# Altium PCB ADS1294.PcbDoc
Units mm, origin at the board's own origin, x right, y up, seen from the top; angles counter-clockwise.
Board outline 50 x 30 mm, 2 copper layers (Top Layer, Bottom Layer); 83 components, 75 nets, 454 pads, 27 vias.
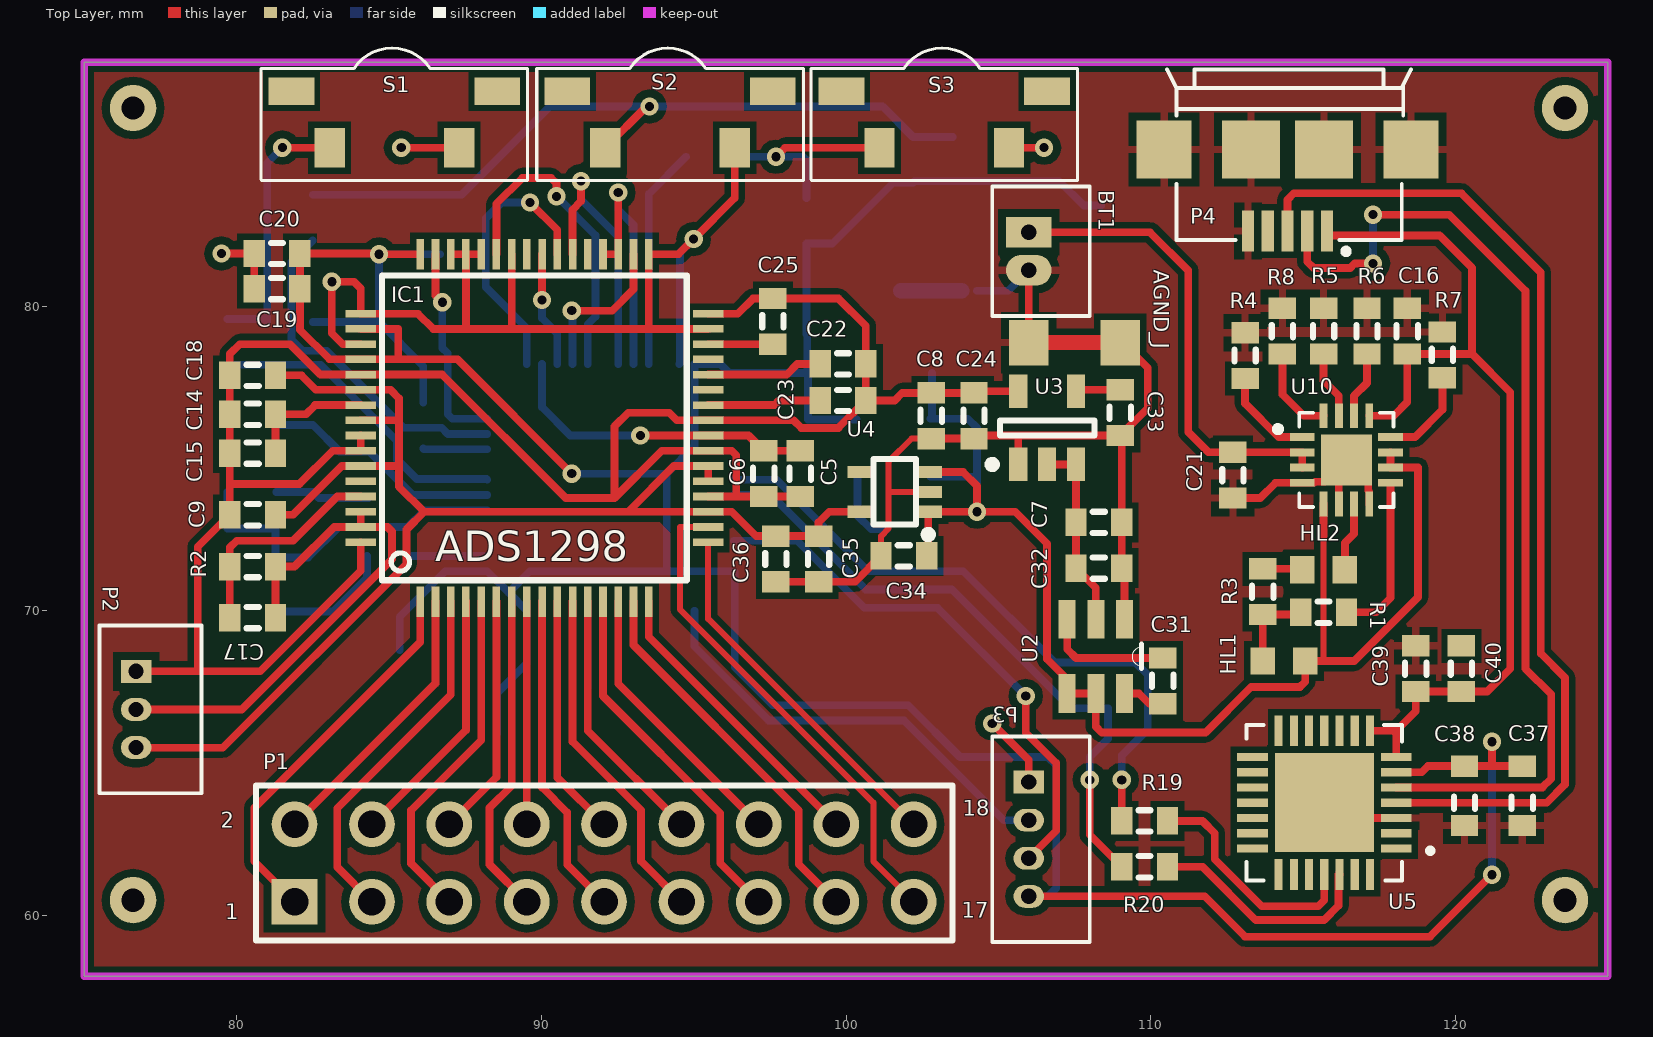
[diagram p0: Top Layer view]
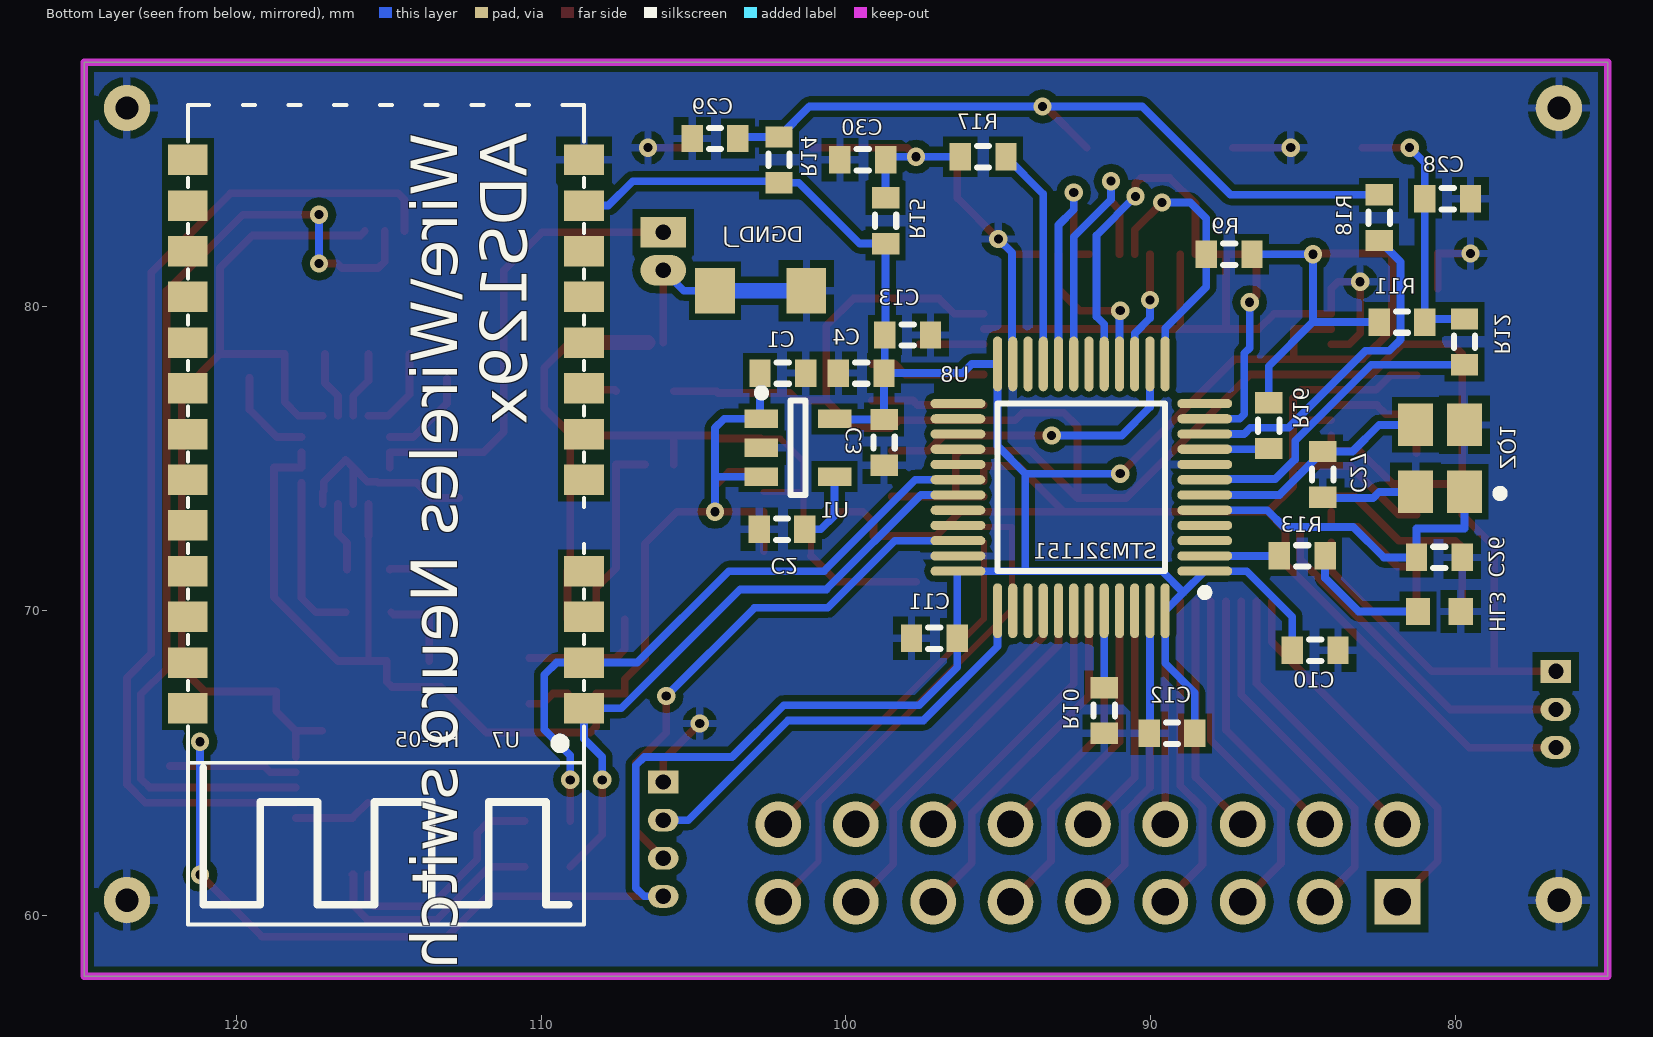
[diagram p1: Bottom Layer view, seen from below]

## Layer stack, top to bottom
Top Solder: solder mask 0.0102, Solder Resist, Dk 3.5
Top Layer: signal copper 0.0356
Dielectric 1: dielectric 0.32, FR-4, Dk 4.8
Bottom Layer: signal copper 0.0356
Bottom Solder: solder mask 0.0102, Solder Resist, Dk 3.5

## Board outline
75,58 125,58 125,88 75,88

## Design rules (kind name [scope] priority, off if disabled: settings)
Clearance [All] p1: gap=0.254 except(0.15: Track-THPad SMDPad-SMDPad; 0.2: Track-Track Track-SMDPad Track-Poly SMDPad-Poly)
PolygonConnect [All] p1: connectstyle=Relief reliefconductorwidth=0.254 reliefentries=4 polygonreliefangle="90 Angle" airgapwidth=0.254
RoutingVias [All] p1: holewidth=0.711 width=1.27 viastyle="Through Hole" minholewidth=0.711 minwidth=1.27 maxholewidth=0.711 maxwidth=1.27
SolderMaskExpansion [All] p1: expansion=0.102
Width [All] p1: maxlimit=0.8 minlimit=0.2 preferedwidth=0.254 toplayer_maxwidth=0.254 bottomlayer_minwidth=0.254 minimp=50.000000 maximp=50.000000 favimp=50.000000
30 further rules are at their usual default settings.

## Components (designator, comment, footprint, x,y, rotation, side; value= is the part's Value field where it differs from the comment)
AGND_J "Jumper 0805" "2012[0805] - Jumper - wa" 107.5,78.8 r180 top net-tie
BT1 "Battery" 653002114822 106,81.8 r270 top
C1 "Cap Semi" J1-0603#1 102.075,77.8 r0 bottom
C2 "Cap Semi" J1-0603#1 102.1,72.675 r180 bottom
C3 "Cap Semi" J1-0603#1 98.75,75.525 r90 bottom
C4 "Cap Semi" J1-0603#1 99.5,77.8 r180 bottom
C5 "Cap Semi" J1-0603#1 98.5,74.5 r270 top
C6 "Cap Semi" J1-0603#1 97.3,74.5 r270 top
C7 "Cap Semi" J1-0603#1 108.3,72.9 r0 top
C8 "Cap Semi" J1-0603#1 102.8,76.4 r90 top
C9 "Cap Semi" J1-0603#1 80.525,73.15 r0 top
C10 "Cap Semi" J1-0603#1 84.6,68.7 r0 bottom
C11 "Cap Semi" J1-0603#1 97.1,69.1 r180 bottom
C12 "Cap Semi" J1-0603#1 89.3,65.975 r180 bottom
C13 "Cap Semi" J1-0603#1 97.975,79.05 r0 bottom
C14 "Cap Semi" J1-0603#1 80.525,76.45 r0 top
C15 "Cap Semi" J1-0603#1 80.525,75.175 r0 top
C16 "Cap Semi" J1-0603#1 118.425,79.175 r270 top
C17 "Cap Semi" J1-0603#1 80.525,69.775 r0 top
C18 "Cap Semi" J1-0603#1 80.525,77.725 r0 top
C19 "Cap Semi" J1-0603#1 81.325,80.575 r180 top
C20 "Cap Semi" J1-0603#1 81.325,81.725 r180 top
C21 "Cap Semi" J1-0603#1 112.7,74.45 r270 top
C22 "Cap Semi" J1-0603#1 99.9,78.1 r180 top
C23 "Cap Semi" J1-0603#1 99.9,76.9 r180 top
C24 "Cap Semi" J1-0603#1 104.2,76.4 r90 top
C25 "Cap Semi" J1-0603#1 97.6,79.5 r270 top
C26 "Cap Semi" J1-0603#1 80.525,71.75 r180 bottom
C27 "Cap Semi" J1-0603#1 84.35,74.475 r270 bottom
C28 "Cap Semi" J1-0603#1 80.25,83.525 r180 bottom
C29 "Cap Semi" J1-0603#1 104.3,85.5 r0 bottom
C30 "Cap Semi" J1-0603#1 99.45,84.8 r0 bottom
C31 "Cap Semi" J1-0603#1 110.4,67.7 r90 top
C32 "Cap Semi" J1-0603#1 108.3,71.4 r0 top
C33 "Cap Semi" J1-0603#1 109,76.5 r90 top
C34 "Cap Semi" J1-0603#1 101.9,71.8 r0 top
C35 "Cap Semi" J1-0603#1 99.1,71.7 r90 top
C36 "Cap Semi" J1-0603#1 97.7,71.7 r90 top
C37 "Cap Semi" J1-0603#2 122.2,63.7 r270 top
C38 "Cap Semi" J1-0603#2 120.3,63.7 r270 top
C39 "Cap Semi" J1-0603#1 118.7,68.1 r90 top
C40 "Cap Semi" J1-0603#1 120.2,68.1 r90 top
DGND_J "Jumper 0805" "2012[0805] - Jumper - wa" 102.8,80.5 r0 bottom net-tie
HL1 "LED_RED" 1608[0603] 114.375,68.35 r180 top
HL2 "LED_GREEN" 1608[0603] 115.675,71.35 r0 top
HL3 "LED_BLUE" 1608[0603] 80.525,69.975 r180 bottom
IC1 "ADS1298" HTQFP-64-PAP 89.775,76 r90 top
P1 "Header 9X2" HDR2X9 81.9,60.45 r0 top
P2 "Header" 653003114822 76.7,66.76 r270 top
P3 "WE-1.25 mm Pitch 653004114822" 653004114822 106,62.5 r270 top
P4 "Micro_USB" Micro_USB 115,85 r270 top
R1 "Res1" J1-0603#1 115.675,69.95 r0 top
R2 "Res1" J1-0603#1 80.525,71.45 r180 top
R3 "Res1" J1-0603#1 113.675,70.625 r90 top
R4 "Res1" J1-0603#1 113.1,78.375 r270 top
R5 "Res1" J1-0603#1 115.675,79.175 r270 top
R6 "Res1" J1-0603#1 117.1,79.175 r270 top
R7 "Res1" J1-0603#1 119.575,78.4 r270 top
R8 "Res1" J1-0603#1 114.325,79.175 r270 top
R9 "Res1" J1-0603#1 87.425,81.7 r0 bottom
R10 "Res1" J1-0603#1 91.525,66.725 r270 bottom
R11 "Res1" J1-0603#1 81.75,79.475 r0 bottom
R12 "Res1" J1-0603#1 79.7,78.825 r90 bottom
R13 "Res1" J1-0603#1 85.025,71.8 r0 bottom
R14 "Res1" J1-0603#1 102.2,84.8 r270 bottom
R15 "Res1" J1-0603#1 98.7,82.8 r270 bottom
R16 "Res1" J1-0603#1 86.125,76.075 r270 bottom
R17 "Res1" J1-0603#1 95.5,84.9 r0 bottom
R18 "Res1" J1-0603#1 82.5,82.9 r90 bottom
R19 "Res1" J1-0603#1 109.8,63.1 r180 top
R20 "Res1" J1-0603#1 109.8,61.6 r180 top
S1 "SW-PB" KLS7-TS3606B 88.55,87.05 r180 top
S2 "SW-PB" KLS7-TS3606B 97.6,87.05 r180 top
S3 "SW-PB" KLS7-TS3606B 106.6,87.05 r180 top
U1 "TPS79333" TI-DBV5_N 101.575,75.35 r180 bottom
U2 "LM2664M6" *SOT95P300X120-6N 108.2,68.5 r270 top
U3 "TPS72325DBVR" TI-DBV5_N 106.6,76 r90 top
U4 "TLV70012DCKR" TI-DCK5_V 101.6,73.9 r180 top
U5 "CP2102N-A01-GQFN28" QFN50P500X500X80-29N 115.7,63.7 r180 top
U7 "HC-05" BT34P-SMD-1.5-26.9X13.0X2.2MM 115.1,86.6 r0 bottom
U8 "STM32L151" STM-LQFP48_N 92.275,74.05 r0 bottom
U10 "BQ24232HARGTR" QFN50P300X300X100-17N 116.425,74.95 r0 top
ZQ1 "24MHz" CFPX-5 80.5,75 r90 bottom

## Footprints (in the part's own frame and the unit in brackets; to place one, negate y for a bottom-side part, rotate by r counter-clockwise, add the part's x,y. Pads: shape width x height; smd on the part's side, far side on the other; paste and mask are expansions set on the pad)
1608[0603] [mm] "Chip Capacitor, Body 1.6x0.8mm, IPC High Density"
  rect 0.8x0.9 smd: 1(-0.7,0) 2(0.7,0)
  body extent -0.87,-0.48 0.87,0.48, height 1.3
"2012[0805] - Jumper - wa" [mm] "Chip Resistor; Body 2.0 x 1.3 mm (LxW typ)"
  rect 1.3x1.5 smd: 1(-1.5,0) 2(1.5,0)
  Top Layer lines w0.5: 1,0 -1,0
653002114822 [mm] "Male Shrouded Header - 02p 1 row"
  rect 1x1.5 hole 0.5: 1(-0.625,0)
  oval 1x1.5 hole 0.5: 2(0.625,0)
  silkscreen extent -2.12,-1.2 2.12,2, body extent -2.12,-1.2 2.12,2, height 4.21
653003114822 [mm] "Male Shrouded Header - 03p 1 row"
  rect 0.75x1 hole 0.5: 1(-1.25,0)
  oval 0.75x1 hole 0.5: 2(0,0) 3(1.25,0)
  silkscreen extent -2.75,-1.2 2.75,2.15, body extent -2.75,-1.2 2.75,2, height 4.21
653004114822 [mm] "Male Shrouded Header - 04p 1 row"
  rect 0.75x1 hole 0.5: 1(-1.875,0)
  oval 0.75x1 hole 0.5: 2(-0.625,0) 3(0.625,0) 4(1.875,0)
  silkscreen extent -3.37,-1.2 3.37,2, body extent -3.37,-1.2 3.38,2, height 4.21
*SOT95P300X120-6N [mil]
  rect 50x22 smd: 1(-48,37) 2(-48,0) 3(-48,-37) 4(48,-37) 5(48,0) 6(48,37)
  silkscreen extent -16,47 16,59
BT34P-SMD-1.5-26.9X13.0X2.2MM [mm]
  rect 1.3x1 smd: 1(-6.5,19.8) 2(-6.5,18.3) 3(-6.5,16.8) 4(-6.5,15.3) 6(-6.5,12.3) 7(-6.5,10.8) 8(-6.5,9.3) 9(-6.5,7.8) 10(-6.5,6.3) 11(-6.5,4.8) 12(-6.5,3.3) 13(-6.5,1.8) 22(6.5,1.8) 23(6.5,3.3) 24(6.5,4.8) 25(6.5,6.3) 26(6.5,7.8) 27(6.5,9.3) 28(6.5,10.8) 29(6.5,12.3) 30(6.5,13.8) 31(6.5,15.3) 32(6.5,16.8) 33(6.5,18.3) 34(6.5,19.8)
  silkscreen extent -6.5,0 6.5,26.9
CFPX-5 [mm] "Quartz Crystal, SM; Body 3.4 x 2.7 mm (LxW max)"
  rect 1.4x1.15 smd: 1(-1.1,-0.8) 2(1.1,-0.8) 3(1.1,0.8) 4(-1.1,0.8)
  silkscreen extent -1.27,-2.09 -1.02,-1.84
HDR2X9 [mm] "Connector; Header; 9x2 Position"
  rect 1.5x1.5 hole 0.9: 1(0,0)
  round 1.5 hole 0.9: 2(0,2.54) 3(2.54,0) 4(2.54,2.54) 5(5.08,0) 6(5.08,2.54) 7(7.62,0) 8(7.62,2.54) 9(10.16,0) 10(10.16,2.54) 11(12.7,0) 12(12.7,2.54) 13(15.24,0) 14(15.24,2.54) 15(17.78,0) 16(17.78,2.54) 17(20.32,0) 18(20.32,2.54)
  silkscreen extent -1.27,-1.27 21.59,3.81
HTQFP-64-PAP [mm]
  rect 1x0.25 smd mask-25.4: 1(-5.7,3.75) 2(-5.7,3.25) 3(-5.7,2.75) 4(-5.7,2.25) 5(-5.7,1.75) 6(-5.7,1.25) 7(-5.7,0.75) 8(-5.7,0.25) 9(-5.7,-0.25) 10(-5.7,-0.75) 11(-5.7,-1.25) 12(-5.7,-1.75) 13(-5.7,-2.25) 14(-5.7,-2.75) 15(-5.7,-3.25) 16(-5.7,-3.75) 33(5.7,-3.75) 34(5.7,-3.25) 35(5.7,-2.75) 36(5.7,-2.25) 37(5.7,-1.75) 38(5.7,-1.25) 39(5.7,-0.75) 40(5.7,-0.25) 41(5.7,0.25) 42(5.7,0.75) 43(5.7,1.25) 44(5.7,1.75) 45(5.7,2.25) 46(5.7,2.75) 47(5.7,3.25) 48(5.7,3.75)
  rect 1x0.25 on Top Solder mask-25.4: 1(-5.7,3.75) 2(-5.7,3.25) 3(-5.7,2.75) 4(-5.7,2.25) 5(-5.7,1.75) 6(-5.7,1.25) 7(-5.7,0.75) 8(-5.7,0.25) 9(-5.7,-0.25) 10(-5.7,-0.75) 11(-5.7,-1.25) 12(-5.7,-1.75) 13(-5.7,-2.25) 14(-5.7,-2.75) 15(-5.7,-3.25) 16(-5.7,-3.75) 33(5.7,-3.75) 34(5.7,-3.25) 35(5.7,-2.75) 36(5.7,-2.25) 37(5.7,-1.75) 38(5.7,-1.25) 39(5.7,-0.75) 40(5.7,-0.25) 41(5.7,0.25) 42(5.7,0.75) 43(5.7,1.25) 44(5.7,1.75) 45(5.7,2.25) 46(5.7,2.75) 47(5.7,3.25) 48(5.7,3.75)
  rect 0.25x1 smd mask-25.4: 17(-3.75,-5.7) 18(-3.25,-5.7) 19(-2.75,-5.7) 20(-2.25,-5.7) 21(-1.75,-5.7) 22(-1.25,-5.7) 23(-0.75,-5.7) 24(-0.25,-5.7) 25(0.25,-5.7) 26(0.75,-5.7) 27(1.25,-5.7) 28(1.75,-5.7) 29(2.25,-5.7) 30(2.75,-5.7) 31(3.25,-5.7) 32(3.75,-5.7) 49(3.75,5.7) 50(3.25,5.7) 51(2.75,5.7) 52(2.25,5.7) 53(1.75,5.7) 54(1.25,5.7) 55(0.75,5.7) 56(0.25,5.7) 57(-0.25,5.7) 58(-0.75,5.7) 59(-1.25,5.7) 60(-1.75,5.7) 61(-2.25,5.7) 62(-2.75,5.7) 63(-3.25,5.7) 64(-3.75,5.7)
  rect 0.25x1 on Top Solder mask-25.4: 17(-3.75,-5.7) 18(-3.25,-5.7) 19(-2.75,-5.7) 20(-2.25,-5.7) 21(-1.75,-5.7) 22(-1.25,-5.7) 23(-0.75,-5.7) 24(-0.25,-5.7) 25(0.25,-5.7) 26(0.75,-5.7) 27(1.25,-5.7) 28(1.75,-5.7) 29(2.25,-5.7) 30(2.75,-5.7) 31(3.25,-5.7) 32(3.75,-5.7) 49(3.75,5.7) 50(3.25,5.7) 51(2.75,5.7) 52(2.25,5.7) 53(1.75,5.7) 54(1.25,5.7) 55(0.75,5.7) 56(0.25,5.7) 57(-0.25,5.7) 58(-0.75,5.7) 59(-1.25,5.7) 60(-1.75,5.7) 61(-2.25,5.7) 62(-2.75,5.7) 63(-3.25,5.7) 64(-3.75,5.7)
  silkscreen extent -5,-5 5,5
J1-0603#1 [mm] "Chip Resistor, Body 1.6x0.8mm, IPC High Density"
  rect 0.7x0.9 smd: 1(-0.75,0) 2(0.75,0)
  silkscreen extent -0.2,-0.35 0.2,0.35, body extent -0.85,-0.48 0.85,0.48, height 0.9
J1-0603#2 [mm] "Chip Resistor, Body 1.6x0.8mm, IPC High Density"
  rect 0.7x0.9 smd: 1(-1.2,0) 2(0.75,0)
  silkscreen extent -0.2,-0.35 0.2,0.35, body extent -0.85,-0.48 0.85,0.48, height 0.9
KLS7-TS3606B [mm]
  rect 1x1.3 smd: 1(5.5,1.85) 2(1.25,1.85)
  rect 1.5x0.9 smd: 3(6.75,0) 4(0,0)
  silkscreen extent -1,-1.42 7.75,2.93
Micro_USB [mm]
  rect 1.35x0.4 smd: 1(2.54,0.792) 2(2.54,0.142) 3(2.54,-0.508) 4(2.54,-1.158) 5(2.54,-1.808)
  rect 1.9x1.8 smd: Z1(-0.135,3.542) Z4(-0.135,-4.558)
  rect 1.9x1.9 smd: Z2(-0.135,0.692) Z3(-0.135,-1.708)
  silkscreen extent -2.76,-4.46 3.26,3.54, body extent -2.91,-4.51 2.99,3.49, height 2.69
QFN50P300X300X100-17N [mm]
  rect 0.82x0.26 smd: 1(-1.45,0.75) 2(-1.45,0.25) 3(-1.45,-0.25) 4(-1.45,-0.75) 9(1.45,-0.75) 10(1.45,-0.25) 11(1.45,0.25) 12(1.45,0.75)
  rect 0.26x0.82 smd: 5(-0.75,-1.45) 6(-0.25,-1.45) 7(0.25,-1.45) 8(0.75,-1.45) 13(0.75,1.45) 14(0.25,1.45) 15(-0.25,1.45) 16(-0.75,1.45)
  rect 1.68x1.68 smd: 17(0,0)
  silkscreen extent -2.34,-1.55 1.55,1.55
QFN50P500X500X80-29N [mm]
  rect 1.01x0.27 smd: 1(-2.36,1.5) 2(-2.36,1) 3(-2.36,0.5) 4(-2.36,0) 5(-2.36,-0.5) 6(-2.36,-1) 7(-2.36,-1.5) 15(2.36,-1.5) 16(2.36,-1) 17(2.36,-0.5) 18(2.36,0) 19(2.36,0.5) 20(2.36,1) 21(2.36,1.5)
  rect 0.27x1.01 smd: 8(-1.5,-2.36) 9(-1,-2.36) 10(-0.5,-2.36) 11(0,-2.36) 12(0.5,-2.36) 13(1,-2.36) 14(1.5,-2.36) 22(1.5,2.36) 23(1,2.36) 24(0.5,2.36) 25(0,2.36) 26(-0.5,2.36) 27(-1,2.36) 28(-1.5,2.36)
  rect 3.25x3.25 smd: 29(0,0)
  silkscreen extent -3.55,-2.55 2.55,2.55
STM-LQFP48_N [mm] "QFP, 48-Leads, Body 7x7mm, Pitch 0.5mm, IPC Medium Density"
  oval 1.8x0.3 smd: 1(-4.05,2.75) 2(-4.05,2.25) 3(-4.05,1.75) 4(-4.05,1.25) 5(-4.05,0.75) 6(-4.05,0.25) 7(-4.05,-0.25) 8(-4.05,-0.75) 9(-4.05,-1.25) 10(-4.05,-1.75) 11(-4.05,-2.25) 12(-4.05,-2.75) 25(4.05,-2.75) 26(4.05,-2.25) 27(4.05,-1.75) 28(4.05,-1.25) 29(4.05,-0.75) 30(4.05,-0.25) 31(4.05,0.25) 32(4.05,0.75) 33(4.05,1.25) 34(4.05,1.75) 35(4.05,2.25) 36(4.05,2.75)
  oval 0.3x1.8 smd: 13(-2.75,-4.05) 14(-2.25,-4.05) 15(-1.75,-4.05) 16(-1.25,-4.05) 17(-0.75,-4.05) 18(-0.25,-4.05) 19(0.25,-4.05) 20(0.75,-4.05) 21(1.25,-4.05) 22(1.75,-4.05) 23(2.25,-4.05) 24(2.75,-4.05) 37(2.75,4.05) 38(2.25,4.05) 39(1.75,4.05) 40(1.25,4.05) 41(0.75,4.05) 42(0.25,4.05) 43(-0.25,4.05) 44(-0.75,4.05) 45(-1.25,4.05) 46(-1.75,4.05) 47(-2.25,4.05) 48(-2.75,4.05)
  silkscreen extent -4.17,-2.75 2.75,3.57, body extent -3.5,-3.5 3.5,3.5, height 1.6
TI-DBV5_N [mm] "SOT23, 5-Leads, Body 2.9x1.6mm, Pitch 0.95mm, IPC Medium Density"
  rect 1.1x0.6 smd: 1(-1.2,0.95) 2(-1.2,0) 3(-1.2,-0.95) 4(1.2,-0.95) 5(1.2,0.95)
  silkscreen extent -1.33,-1.55 0.25,1.92, body extent -0.88,-1.52 0.87,1.52, height 1.45
TI-DCK5_V [mm] "SOT23, 5-Leads, Body 2x1.25mm, Pitch 0.65mm"
  rect 0.9x0.4 smd: 1(-1.1,0.65) 2(-1.1,0) 3(-1.1,-0.65) 4(1.1,-0.65) 5(1.1,0.65)
  silkscreen extent -1.23,-1.07 0.7,1.52, body extent -0.63,-1 0.63,1, height 1.1

## Part data
AGND_J DGND_J: "Перемычка"
BT1: "Multicell Battery"
C1 C2 C3 C4 C5 C6 C7 C8 C9 C10 C11 C12 C13 C14 C15 C16 C17 C18 C19 C20 C21 C22 C23 C24 C25 C26 C27 C28 C29 C30 C31 C32 C33 C34 C35 C36 C37 C38 C39 C40: "Capacitor (Semiconductor SIM Model)"
HL1 HL2 HL3: library part "LED SMD", "Typical INFRARED GaAs LED"
IC1: "8-Channel 24-Bit Analog-To-Digital Converter With Integrated ECG Front End"
P1: "Header, 9-Pin, Dual row"
P2: library part "WE-1.25 mm Pitch 653003114822", "WR-WTB 1.25mm"
P3: "WR-WTB 1.25mm"
P4: library part "WE-Communication Connectors 629105136821", "WR-COM Micro USB SMT Type B"
R1 R2 R3 R4 R5 R6 R7 R8 R9 R10 R11 R12 R13 R14 R15 R16 R17 R18 R19 R20: "Resistor"
S1 S2 S3: "Switch"
U1: library part TPS79333DBVREP, "Single Output Fast RF LDO, 200 mA, Fixed 3.3 V Output, 2.7 to 5.5 V Input, 5-pin SOT-23 (DBV), -40 to 125 degC, Green (RoHS & no Sb/Br)"
U2: "Switched Capacitor Voltage Converter 6-SOT-23 -40 to 85"
U3: "Single Output High PSRR LDO, 200 mA, Fixed -2.5 V Output, -10 to -2.7 V Input, 5-pin SOT-23 (DBV), -40 to 125 degC, Green (RoHS & no Sb/Br)"
U4: "Single Output LDO, 200 mA, Fixed 1.2 V Output, 2 to 5.5 V Input, with Low IQ, 5-pin SC70 (DCK), -40 to 125 degC, Green (RoHS & no Sb/Br)"
U5: "Usb-Uart Interface Bridge, Qfn-28"
U7: library part MOUDLE-BLUETOOTH-HC-05(34P-27X13MM), "Semiconductors and Actives, pin, soic"
U8: library part STM32L151C8T6, "ARM Cortex-M3 32-bit MCU, 64 KB Flash, 10 KB Internal RAM, 37 I/Os, 48-pin LQFP, -40 to 85 degC, Tray"
U10: "USB-Friendly Lithium-Ion Battery Charger and Power-Path Management IC 0.5A 10.5V OVP 16-Pin QFN T/R"
ZQ1: library part "QUARTZ - KX7", "Quartz smd - case KX - 7 Geyer"

## Free pads (board coordinates)
  round 1.524 hole 0.762: 2(123.6,60.5) 3(123.6,86.5) 4(76.6,86.5) 5(76.6,60.5)

## Via types
v1: diameter 0.6, hole 0.3, Top Layer to Bottom Layer, 27 vias

## Nets (pads, with @x,y where several pads share a name; then routed paths per layer and width w, separated by ;. In a path a pad name is that pad's centre, name@x,y a point inside that pad or via, vN(x,y) a via of type N, cw(c..) or ccw(c..) an arc to the next point about the centre after c; other vN are vias at no path point)
5V: C16.2 C39.1 C40.1 P4.1 U5.7 U5.8 U10.13 | length 30.8
  Top Layer w0.254: P4.1 115.933,82.319 119.481,82.319 120.55,81.25 120.55,78.425 ; U10.13 117.975,76.4 118.425,76.85 C16.2 120.55,78.425 ; U5.8 117.96,66.06 118.06,65.96 ; U5.7 118.06,66.06 118.7,66.7 C39.1 C40.1 ; C40.1 121.05,67.35 121.8,68.1 121.8,77.175 120.55,78.425
-VCC: C7.1 C32.1 U2.2 U3.2 U3.3 | length 6.3
  Top Layer w0.254: U3.2 U3.3 C7.1 C32.1 108.2,70.75 U2.2
AGND: C5.2 C6.2 C8.2 C9.1 C14.1 C15.1 C18.1 C22.1 C23.1 C24.2 C25.1 IC1.20@95.475,73.75 IC1.23@95.475,75.25 IC1.25@95.475,76.25 IC1.32@95.475,79.75 IC1.53@84.075,77.75 IC1.57@84.075,75.75 IC1.58@84.075,75.25 IC1.64@84.075,72.25 P2.1 U3.5 | length 74.4
  Top Layer w0.254: P2.1 80.772,68.01 84.075,71.313 IC1.64@84.075,72.25 ; 78.725,68.01 78.725,72.1 C9.1 79.775,74.163 ; IC1.57@84.075,75.75 84.075,75.25 83.15,75.25 82.063,74.163 79.775,74.163 ; IC1.20@95.475,73.75 C6.2 C5.2 ; IC1.32@95.475,79.75 96.45,79.75 96.95,80.25 C25.1 99.75,80.25 100.65,79.35 C22.1 C23.1 ; 96.4,73.75 96.4,75.1 96.25,75.25 95.475,75.25 93.95,75.25 92.4,73.7 ; U3.5 104.25,77.2 C24.2 C8.2 101.85,77.15 101.6,76.9 C23.1 ; 79.775,74.163 C15.1 C14.1 C18.1 79.775,78.425 80.1,78.75 81.75,78.75 82.75,77.75 84.075,77.75 86.75,77.75 90.8,73.7 92.4,73.7 ; 92.4,73.7 92.4,76.05 92.85,76.5 94.2,76.5 94.45,76.25 95.475,76.25 98.277,76.25 98.527,76 99.75,76 C23.1
AIN1N: IC1.15@93.025,70.3 P1.15 | length 12.6
  Top Layer w0.254: IC1.15@93.025,70.3 93.025,68.875 98.45,63.45 98.45,61.68 P1.15
AIN2N: IC1.13@92.025,70.3 P1.13 | length 12
  Top Layer w0.254: IC1.13@92.025,70.3 92.025,67.2 95.875,63.35 95.875,61.715 P1.13
AIN3N: IC1.11@91.025,70.3 P1.11 | length 11.3
  Top Layer w0.254: IC1.11@91.025,70.3 91.025,65.7 93.275,63.45 93.275,61.775 P1.11
AIN4N: IC1.9@90.025,70.3 P1.9 | length 10.7
  Top Layer w0.254: IC1.9@90.025,70.3 90.025,64.2 90.85,63.375 90.85,61.66 P1.9
AIN5N: IC1.7@89.025,70.3 P1.7 | length 10.7
  Top Layer w0.254: IC1.7@89.025,70.3 89.025,64.259 88.3,63.534 88.3,61.67 P1.7
AIN6N: IC1.5@88.025,70.3 P1.5 | length 11.3
  Top Layer w0.254: P1.5 85.725,61.705 85.725,63.45 88.025,65.75 IC1.5@88.025,70.3
AIN7N: IC1.3@87.025,70.3 P1.3 | length 11.9
  Top Layer w0.254: P1.3 83.3,61.59 83.3,63.519 87.025,67.244 IC1.3@87.025,70.3
AIN8N: IC1.1@86.025,70.3 P1.1 | length 12.7
  Top Layer w0.254: P1.1 80.575,61.775 80.575,63.525 86.025,68.975 IC1.1@86.025,70.3
AVDD: C9.2 C18.2 C35.2 C36.2 IC1.19@95.475,73.25 IC1.21@95.475,74.25 IC1.22@95.475,74.75 IC1.54@84.075,77.25 IC1.56@84.075,76.25 IC1.59@84.075,74.75 P2.3 U4.5 | length 46.7
  Top Layer w0.254: P2.3@76.7,65.5 79.547,65.5 85.573,71.526 85.573,72.665 86.154,73.246 ; C9.2 81.85,73.15 83.45,74.75 84.075,74.75 85.325,74.75 ; C18.2 82.125,77.725 82.6,77.25 84.075,77.25 85.05,77.25 85.325,76.975 85.325,76.25 ; IC1.56@84.075,76.25 85.325,76.25 ; 92.846,73.246 86.154,73.246 ; IC1.21@95.475,74.25 95.475,74.75 94.35,74.75 92.85,73.25 95.475,73.25 96.25,73.25 97.05,72.45 C36.2 C35.2 99.1,72.9 99.45,73.25 U4.5 ; 85.325,74.75 85.325,74.075 86.154,73.246 ; 85.325,74.75 85.325,76.25
AVSS: AGND_J.1 C7.2 C8.1 C24.1 C32.2 C34.1 C35.1 C36.1 U2.1 U3.1 U4.2 | length 27.1
  Top Layer w0.2: C34.1 101.15,72.45 101.4,72.7 101.4,73.9 ; U4.2 101.4,73.9 ; C8.1 102.15,75.65 101.4,74.9 101.4,73.9
  Top Layer w0.254: C36.1 C35.1 100.3,70.95 C34.1 ; C8.1 C24.1 104.3,75.75 105.6,75.75 ; U3.1 105.65,75.7 105.6,75.75 ; AGND_J.1@109.077,78.8 109.9,77.977 109.9,76.65 109,75.75 ; U2.1 109.14,71.31 C32.2 C7.2 109.05,75.7 109,75.75 ; 105.6,75.75 109,75.75
BIAS1: IC1.17@95.475,72.25 P1.18 | length 12.1
  Top Layer w0.2: IC1.17@95.475,72.25 95.475,69.735 P1.18
BIAS2: IC1.18@95.475,72.75 P1.17 | length 16.4
  Top Layer w0.2: IC1.18@95.475,72.75 94.55,72.75 94.55,70.05 100.9,63.7 100.9,61.77 P1.17
BUTTON_1: R17.1 U8.21 | length 7.3
  Bottom Layer w0.254: U8.21 93.525,83.675 R17.1
BUTTON_2: R18.1 U8.10 | length 11.2
  Bottom Layer w0.254: R18.1 81.8,81.45 81.8,78.9 82.171,78.529 82.95,78.529 85.477,76.002 86.731,76.002 86.933,75.8 U8.10
CS: IC1.39@90.525,81.7 R9.2 U8.13 | length 9.1
  Top Layer w0.254: v1(89.625,83.4) 90.525,82.5 IC1.39@90.525,81.7
  Bottom Layer w0.254: U8.13 89.525,79.275 88.175,80.625 R9.2 88.175,82.875 88.7,83.4 v1(89.625,83.4)
D+: P4.3 U5.4 | length 33.4
  Top Layer w0.254: P4.3 114.492,83.492 114.7,83.7 120.2,83.7 122.8,81.1 122.8,68.6 123.6,67.8 123.6,64.3 123,63.7 U5.4
D-: P4.2 U5.5 | length 32.5
  Top Layer w0.254: P4.2 115.142,81.458 115.35,81.25 116.55,81.25 116.7,81.4 v1(117.3,81.4) ; v1(117.3,83) 119.8,83 122.3,80.5 122.3,68.1 123.146,67.254 123.146,64.488 122.858,64.2 U5.5
  Bottom Layer w0.254: v1(117.3,81.4) v1(117.3,83)
DGND: C1.1 C2.1 C3.1 C4.1 C10.1 C11.1 C12.1 C13.1 C19.2 C20.2 C26.2 C27.2 C28.2 C29.2 C30.2 DGND_J.1 HL3.2 IC1.31@95.475,79.25 IC1.33@93.525,81.7 IC1.42@89.025,81.7 IC1.44@88.025,81.7 IC1.45@87.525,81.7 IC1.46@87.025,81.7 IC1.49@84.075,79.75 IC1.51@84.075,78.75 P3.1 pad.2 pad.3 pad.4 pad.5 R10.2 S1.2 S2.2 S3.2 U1.2 U7.13 U8.8 U8.23 U8.35 U8.47 ZQ1.2 ZQ1.4 | length 49.6
  Top Layer w0.254: v1(79.5,81.725) C20.2 C19.2 ; IC1.51@84.075,78.75 83.488,78.75 83.125,79.113 v1(83.125,80.8) 83.85,80.8 84.075,80.575 84.075,79.75 85.95,79.75 86.45,79.25 87.525,79.25 ; v1(85.4,85.2) S1.2 ; IC1.46@87.025,81.7 IC1.45@87.525,81.7 ; IC1.44@88.025,81.7 IC1.45@87.525,81.7 ; IC1.42@89.025,81.7 89.025,79.25 ; IC1.31@95.475,79.25 94.175,79.25 ; S2.2 96.35,83.55 v1(95,82.2) 94.5,81.7 93.525,81.7 93.525,79.25 94.175,79.25 ; v1(104.8,66.3) 106,65.1 P3.1 ; S3.2 v1(106.5,85.2) ; 87.525,79.25 IC1.45@87.525,81.7 ; 87.525,79.25 89.025,79.25 ; 89.025,79.25 94.175,79.25
  Bottom Layer w0.254: ZQ1.4 82.5,73.9 82.7,73.7 84.325,73.7 C27.2 ; C12.1@90.025,66 U8.47 ; U8.23 94.548,78.123 94.548,81.748 v1(95,82.2)
DIN: IC1.34@93.025,81.7 U8.16 | length 5.2
  Top Layer w0.254: v1(91,79.85) 92.325,79.85 93.025,80.55 IC1.34@93.025,81.7
  Bottom Layer w0.254: v1(91,79.85) 91.025,79.825 U8.16
DOUT: IC1.43@88.525,81.7 U8.17 | length 10.6
  Top Layer w0.254: IC1.43@88.525,81.7 88.525,83.353 89.372,84.2 90.322,84.2 90.5,84.022 v1(90.5,83.6)
  Bottom Layer w0.254: v1(90.5,83.6) 91.775,82.325 91.775,79.65 91.525,79.4 U8.17
DRDY: IC1.47@86.525,81.7 U8.11 | length 6.8
  Top Layer w0.254: IC1.47@86.525,81.7 86.525,80.35 v1(86.752,80.123)
  Bottom Layer w0.254: v1(86.752,80.123) 86.752,78.623 86.925,78.45 86.925,76.45 87.075,76.3 U8.11
DVCC: C3.2 C4.2 C10.2 C11.2 C12.2 C13.2 C19.1 C20.1 C37.1 C38.1 IC1.48@86.025,81.7 IC1.50@84.075,79.25 IC1.52@84.075,78.25 P3.4 R9.1 R11.2 R14.2 R15.2 R16.1 U1.5 U5.6 U7.12 U8.1 U8.24 U8.36 U8.48 | length 126.2
  Top Layer w0.254: IC1.50@84.075,79.25 85.3,79.25 85.3,78.25 ; IC1.48@86.025,81.7 v1(84.675,81.7) 84.65,81.725 C20.1 C19.1 82.075,79.225 83.05,78.25 84.075,78.25 87.25,78.25 v1(91,74.5) ; P3.4 111.775,60.625 113.1,59.3 119.165,59.3 v1(121.2,61.335) ; U5.6 118.9,64.7 119.1,64.9 C38.1 121.25,64.9 ; v1(121.2,65.7) 121.2,64.95 121.25,64.9 ; C37.1 121.25,64.9
  Bottom Layer w0.254: R11.2 84.675,79.475 ; C10.2 85.35,69.8 86.85,71.3 U8.1 88.925,70.6 ; R16.1 86.125,78.025 84.675,79.475 ; R9.1 v1(84.675,81.7) 84.675,79.475 ; C12.2 88.55,67.3 89.525,68.275 U8.48 88.925,70.6 ; v1(91,74.5) 94.119,74.5 ; 94.119,71.306 94.119,74.5 ; C13.2@98.7,79.075 R15.2 99.55,82.05 101.55,84.05 R14.2 102.247,84.097 107.003,84.097 107.8,83.3 U7.12@108.375,83.3 ; C13.2 98.725,77.825 C4.2 ; U1.5@100.35,76.275 C3.2 C4.2 ; P3.4 106.625,60.625 106.9,60.9 106.9,64.925 106.625,65.2 103.742,65.2 102.042,66.9 97.6,66.9 96.35,68.15 C11.2 96.35,71.275 U8.36 89.625,71.3 88.925,70.6 ; v1(121.2,61.335) v1(121.2,65.7) ; 94.119,74.5 95.025,75.406 U8.24 95.875,78.1 96.175,77.8 C4.2
GND: AGND_J.2 BT1.2 C16.1 C21.2 C37.2 C38.2 C39.2 DGND_J.2 P4.5 P4.Z1 P4.Z2 P4.Z3 P4.Z4 R4.1 R5.1 R6.1 R7.1 R8.1 U5.3 U5.29 U10.4 U10.6 U10.8 U10.17 | length 14.1
  Top Layer w0.254: AGND_J.2 BT1.2 ; C21.2 113.6,73.7 114.1,74.2 U10.4 115.373,74.2 115.41,74.237 115.712,74.237 U10.17@116.175,74.7 ; U5.29 116.2,63.2 U5.3 ; U10.6 U10.17@116.175,74.7 ; U10.8 117.175,73.898 117.138,73.935 117.138,74.237 U10.17 U10.17@116.175,74.7
  Bottom Layer w0.254: DGND_J.2 105.325,80.5 BT1.2
LED_USR: R13.2 U8.2 | length 2.5
  Bottom Layer w0.254: R13.2 U8.2
NetBT1_1: BT1.1 C21.1 U10.2 U10.3 | length 15.6
  Top Layer w0.254: BT1.1 109.975,82.425 111.233,81.167 111.233,75.867 111.9,75.2 C21.1 U10.2 U10.3
NetC2_2: C2.2 U1.4 | length 2.4
  Bottom Layer w0.254: U1.4 100.375,73.125 100.825,72.675 C2.2
NetC5_1: C5.1 C6.1 IC1.24@95.475,75.75 | length 3.2
  Top Layer w0.254: IC1.24@95.475,75.75 96.8,75.75 C6.1 C5.1
NetC14_2: C14.2 C15.2 IC1.55@84.075,76.75 | length 4.2
  Top Layer w0.254: C15.2 C14.2 82.275,76.45 82.575,76.75 IC1.55@84.075,76.75
NetC17_1: C17.1 IC1.61@84.075,73.75 R2.2 | length 7.3
  Top Layer w0.254: C17.1 R2.2 79.775,72.075 80,72.3 81.85,72.3 83.3,73.75 IC1.61@84.075,73.75
NetC22_2: C22.2 IC1.28@95.475,77.75 | length 3.8
  Top Layer w0.254: IC1.28@95.475,77.75 98.05,77.75 98.4,78.1 C22.2
NetC23_2: C23.2 IC1.26@95.475,76.75 | length 3.7
  Top Layer w0.254: IC1.26@95.475,76.75 97.65,76.75 97.8,76.9 C23.2
NetC25_2: C25.2 IC1.30@95.475,78.75 | length 2.1
  Top Layer w0.254: IC1.30@95.475,78.75 C25.2
NetC26_1: C26.1 U8.5 ZQ1.1 | length 11.3
  Bottom Layer w0.254: ZQ1.1 79.7,72.7 81.275,72.7 C26.1 82.35,71.75 83.35,72.75 85.625,72.75 86.175,73.3 U8.5
NetC27_1: C27.1 U8.6 ZQ1.3 | length 7.9
  Bottom Layer w0.254: ZQ1.3 82.5,76.1 83.375,75.225 C27.1 85.775,73.8 U8.6
NetC29_1: C29.1 R14.1 R18.2 S2.1 | length 24.6
  Top Layer w0.254: S2.1 93.45,86.55 v1(93.55,86.55)
  Bottom Layer w0.254: R18.2 87.378,83.65 90.278,86.55 v1(93.55,86.55) 101.2,86.55 R14.1 C29.1@103.5,85.55
NetC30_1: C30.1 R15.1 R17.2 S3.1 | length 7.3
  Top Layer w0.254: v1(97.7,84.9) 98,85.2 S3.1
  Bottom Layer w0.254: R17.2 v1(97.7,84.9) 98.6,84.9 C30.1 R15.1
NetC31_1: C31.1 U2.6 | length 1.4
  Top Layer w0.254: U2.6 109.619,67.281 109.95,66.95 C31.1
NetC31_2: C31.2 U2.3 | length 4.2
  Top Layer w0.254: U2.3 107.26,68.74 107.55,68.45 C31.2
NetC33_2: C33.2 U3.4 | length 1.5
  Top Layer w0.254: U3.4 107.6,77.25 C33.2
NetHL1_2: HL1.2 R1.1 R3.1 | length 2.8
  Top Layer w0.254: HL1.2 R3.1 114.85,69.875 R1.1
NetHL2_1: HL2.1 R3.2 | length 1.3
  Top Layer w0.254: R3.2 114.95,71.375 HL2.1
NetHL2_2: HL2.2 U10.7 | length 2.3
  Top Layer w0.254: HL2.2 116.375,72.225 116.675,72.525 U10.7
NetHL3_1: HL3.1 R13.1 | length 4.2
  Bottom Layer w0.254: HL3.1 83.175,69.975 84.275,71.075 R13.1
NetIC1_2: IC1.2@86.525,70.3 P1.2 | length 9.2
  Top Layer w0.254: P1.2 86.525,67.615 IC1.2@86.525,70.3
NetIC1_4: IC1.4@87.525,70.3 P1.4 | length 8.6
  Top Layer w0.254: P1.4 87.525,66.075 IC1.4@87.525,70.3
NetIC1_6: IC1.6@88.525,70.3 P1.6 | length 7.9
  Top Layer w0.254: P1.6 88.525,64.535 IC1.6@88.525,70.3
NetIC1_8: IC1.8@89.525,70.3 P1.8 | length 7.3
  Top Layer w0.254: P1.8 89.525,62.995 IC1.8@89.525,70.3
NetIC1_10: IC1.10@90.525,70.3 P1.10 | length 7.9
  Top Layer w0.254: IC1.10@90.525,70.3 90.525,64.525 P1.10
NetIC1_12: IC1.12@91.525,70.3 P1.12 | length 8.6
  Top Layer w0.254: IC1.12@91.525,70.3 91.525,66.065 P1.12
NetIC1_14: IC1.14@92.525,70.3 P1.14 | length 9.2
  Top Layer w0.254: IC1.14@92.525,70.3 92.525,67.605 P1.14
NetIC1_16: IC1.16@93.525,70.3 P1.16 | length 9.9
  Top Layer w0.254: IC1.16@93.525,70.3 93.525,69.145 P1.16
NetR1_2: R1.2 U10.9 | length 5.4
  Top Layer w0.254: R1.2 117.4,69.95 117.875,70.425 U10.9
NetR4_2: R4.2 U10.1 | length 3.2
  Top Layer w0.254: R4.2 113.1,76.8 114.2,75.7 U10.1
NetR5_2: R5.2 U10.15 | length 2.2
  Top Layer w0.254: R5.2 115.675,77.55 116.175,77.05 U10.15
NetR6_2: R6.2 U10.14 | length 2.2
  Top Layer w0.254: U10.14 116.675,77.05 117.1,77.475 R6.2
NetR7_2: R7.2 U10.12 | length 3.1
  Top Layer w0.254: U10.12 118.675,75.7 119.575,76.6 R7.2
NetR8_2: R8.2 U10.16 | length 3
  Top Layer w0.254: R8.2 114.325,77.1 115.025,76.4 U10.16
NetR10_1: R10.1 U8.44 | length 2.5
  Bottom Layer w0.254: R10.1 U8.44
NetR12_1: R12.1 U8.7 | length 10.5
  Bottom Layer w0.254: R12.1 82.762,78.075 85.255,75.583 85.255,74.963 85.275,74.963 85.915,74.323 88.202,74.323 U8.7
NetR16_2: R16.2 U8.9 | length 2.1
  Bottom Layer w0.254: R16.2 86.15,75.3 U8.9
NRST: C28.1 R11.1 R12.2 S1.1 | length 8.8
  Top Layer w0.254: v1(81.5,85.2) S1.1
  Bottom Layer w0.254: R12.2 80.9,79.575 R11.1 C28.1 81,84.7 v1(81.5,85.2)
RESET: IC1.35@92.525,81.7 IC1.36@92.025,81.7 U8.20 | length 8.4
  Top Layer w0.254: IC1.36@92.025,81.7 92.525,81.7 v1(92.525,83.725)
  Bottom Layer w0.254: v1(92.525,83.725) 92.525,83.16 93.025,82.66 U8.20
RLD: C17.2 IC1.62@84.075,73.25 IC1.63@84.075,72.75 P2.2 R2.1 | length 17.9
  Top Layer w0.254: P2.2 80.165,66.76 85.1,71.696 85.1,72.6 84.95,72.75 IC1.63@84.075,72.75 ; C17.2 R2.1 81.9,71.45 83.2,72.75 IC1.63@84.075,72.75 ; IC1.62@84.075,73.25 IC1.63@84.075,72.75
SCLK: IC1.40@90.025,81.7 U8.15 | length 3.8
  Top Layer w0.254: v1(90.025,80.2) IC1.40@90.025,81.7
  Bottom Layer w0.254: v1(90.025,80.2) 90.025,79.6 90.525,79.1 U8.15
START: IC1.38@91.025,81.7 U8.19 | length 9
  Top Layer w0.254: IC1.38@91.025,81.7 91.025,83.162 91.3,83.437 v1(91.3,84.1)
  Bottom Layer w0.254: v1(91.3,84.1) 91.3,83.5 92.525,82.275 U8.19
SWCLK: P3.2 U8.37 | length 14.5
  Bottom Layer w0.254: U8.37 95.025,68.833 97.458,66.4 101.9,66.4 105.175,63.125 P3.2
SWDIO: P3.3 U8.34 | length 17.8
  Top Layer w0.254: v1(105.9,67.2) 105.9,66 106.9,65 106.9,62.775 P3.3
  Bottom Layer w0.254: U8.34 98.4,72.3 100.6,70.1 103,70.1 v1(105.9,67.2)
UART_RX: R20.2 U7.1 U8.31 | length 21.1
  Top Layer w0.254: v1@108,64.5 108,62.65 R20.2
  Bottom Layer w0.254: U8.31 97.542,73.8 100.642,70.7 103.475,70.7 107.375,66.8 U7.1 108.6,65.8 108,65.2 v1@108,64.5
  other v1: 108,64.45
UART_RX_: R20.1 U5.26 | length 7.6
  Top Layer w0.254: R20.1 111.7,61.6 113.454,59.846 115.688,59.846 116.162,60.32 116.162,61.34 U5.26
UART_TX: R19.2 U7.2 U8.30 | length 21.4
  Top Layer w0.254: R19.2 v1(109.05,64.45)
  Bottom Layer w0.254: U8.30 97.725,74.3 100.725,71.3 103.85,71.3 106.85,68.3 U7.2 109.5,68.3 109.9,67.9 109.9,66.1 109.05,65.25 v1(109.05,64.45)
UART_TX_: R19.1 U5.25 | length 7.7
  Top Layer w0.254: R19.1 111.7,63.1 112.1,62.7 112.1,61.842 113.642,60.3 115.5,60.3 115.7,60.5 U5.25
VCC: C1.2 C34.2 HL1.1 U1.1 U1.3 U2.4 U2.5 U4.1 U4.3 U10.5 U10.10 U10.11 | length 46.6
  Top Layer w0.2: 115.675,68.35 115.675,72.45
  Top Layer w0.254: C34.2@102.7,71.95 U4.1 v1(104.3,73.25) ; U4.3 103.85,74.55 104.3,74.1 v1(104.3,73.25) ; 115.675,72.45 U10.5 ; U10.11 U10.10 118.775,74.7 118.775,70.447 116.678,68.35 HL1.1 115.075,67.675 114.9,67.5 113.3,67.5 111.8,66 108.4,66 108.2,66.2 U2.5 U2.4 107.26,67.752 106.6,68.413 106.6,72.2 105.55,73.25 v1(104.3,73.25)
  Bottom Layer w0.254: U1.3 104.3,74.4 ; C1.2 102.825,76.35 U1.1 104,76.3 104.3,76 v1(104.3,73.25)
pads on no net: C33.1 C40.2 IC1.1@86.025,70.3 IC1.2@86.525,70.3 IC1.3@87.025,70.3 IC1.4@87.525,70.3 IC1.5@88.025,70.3 IC1.6@88.525,70.3 IC1.7@89.025,70.3 IC1.8@89.525,70.3 IC1.9@90.025,70.3 IC1.10@90.525,70.3 IC1.11@91.025,70.3 IC1.12@91.525,70.3 IC1.13@92.025,70.3 IC1.14@92.525,70.3 IC1.15@93.025,70.3 IC1.16@93.525,70.3 IC1.17@95.475,72.25 IC1.18@95.475,72.75 IC1.19@95.475,73.25 IC1.20@95.475,73.75 IC1.21@95.475,74.25 IC1.22@95.475,74.75 IC1.23@95.475,75.25 IC1.24@95.475,75.75 IC1.25@95.475,76.25 IC1.26@95.475,76.75 IC1.27 IC1.28@95.475,77.75 IC1.29 IC1.30@95.475,78.75 IC1.31@95.475,79.25 IC1.32@95.475,79.75 IC1.33@93.525,81.7 IC1.34@93.025,81.7 IC1.35@92.525,81.7 IC1.36@92.025,81.7 IC1.37 IC1.38@91.025,81.7 IC1.39@90.525,81.7 IC1.40@90.025,81.7 IC1.41 IC1.42@89.025,81.7 IC1.43@88.525,81.7 IC1.44@88.025,81.7 IC1.45@87.525,81.7 IC1.46@87.025,81.7 IC1.47@86.525,81.7 IC1.48@86.025,81.7 IC1.49@84.075,79.75 IC1.50@84.075,79.25 IC1.51@84.075,78.75 IC1.52@84.075,78.25 IC1.53@84.075,77.75 IC1.54@84.075,77.25 IC1.55@84.075,76.75 IC1.56@84.075,76.25 IC1.57@84.075,75.75 IC1.58@84.075,75.25 IC1.59@84.075,74.75 IC1.60 IC1.61@84.075,73.75 IC1.62@84.075,73.25 IC1.63@84.075,72.75 IC1.64@84.075,72.25 P4.4 S1.3 S1.4 S2.3 S2.4 S3.3 S3.4 U4.4 U5.1 U5.2 U5.9 U5.10 U5.11 U5.12 U5.13 U5.14 U5.15 U5.16 U5.17 U5.18 U5.19 U5.20 U5.21 U5.22 U5.23 U5.24 U5.27 U5.28 U7.3 U7.4 U7.6 U7.7 U7.8 U7.9 U7.10 U7.11 U7.22 U7.23 U7.24 U7.25 U7.26 U7.27 U7.28 U7.29 U7.30 U7.31 U7.32 U7.33 U7.34 U8.3 U8.4 U8.12 U8.14 U8.18 U8.22 U8.25 U8.26 U8.27 U8.28 U8.29 U8.32 U8.33 U8.38 U8.39 U8.40 U8.41 U8.42 U8.43 U8.45 U8.46
copper on no net: | length 7.3
  Top Layer w0.254: v1(93.25,75.75) 95.475,75.75
  Bottom Layer w0.254: 90.025,78.1 90.025,77.025 90.025,76.675 90.95,75.75 v1(93.25,75.75)

## Polygon pours and split planes (outlines as drawn)
DGND on Bottom Layer "DGND" (solid, pour order 2): 75,88 125,88 125,58 75,58
GND on Top Layer "AVSS" (solid, pour order 4): 75,88 125,88 125,58 75,58

## Keep-outs
Keep-Out Layer:
  the board outline again, w0.254

## Other copper
Top Layer:
  pour cut-out: 79.098,71.907 79.071,71.88 79.058,71.88 79.058,68.343 80.634,68.343 81.299,69.008 81.25,69.056 81.25,69.125 80.725,69.125 80.725,70.425 80.942,70.425 80.942,70.8 80.725,70.8 80.725,71.967 80.325,71.967 80.325,70.8 80.108,70.8 80.108,70.425 80.325,70.425 80.325,69.125 79.225,69.125 79.225,70.425 79.442,70.425 79.442,70.8 79.225,70.8 79.225,71.84
  pour cut-out: 77.218,67.254 77.218,67.342 77.256,67.381 77.454,67.381 77.454,67.677 80.444,67.677 80.444,67.608 80.492,67.559 80.026,67.093 77.359,67.093
  pour cut-out: 114.275,67.7 114.475,67.7 114.475,69 115.369,69 115.369,69.3 115.344,69.325 114.008,69.325 114.008,69 114.275,69
  pour cut-out: 111.05,67.5 111.05,67.9 109.661,67.9 109.619,67.941 109.619,67.614 109.757,67.614 109.872,67.5
  pour cut-out: 113.404,74.304 113.404,74.155 113.457,74.103 113.83,74.103 114.365,74.638 114.365,74.867 113.35,74.867 113.35,74.358
  pour cut-out: 114.185,73.814 114.188,73.816 115.345,73.816 115.345,74.172 115.373,74.2 114.1,74.2
  pour cut-out: 101.7,71.15 102.1,71.15 102.1,72.45 102.367,72.45 102.367,72.85 102.05,72.85 102.05,73.594 101.706,73.594
  pour cut-out: 97.05,71.5 97.05,71.9 99.75,71.9 99.75,72.785 99.815,72.85 100.938,72.85 100.99,72.797 100.99,72.596 100.844,72.45 100.6,72.45 100.6,71.722 100.162,71.283 99.75,71.283 99.75,71.5
  pour cut-out: 94.244,72.75 94.244,72.556 93.8,73 94.038,73 94.252,72.85 94.252,72.79
  pour cut-out: 96.175,79.083 96.175,79.417 96.667,79.417 96.95,79.7 98.25,79.7 98.25,79.917 99.612,79.917 100.317,79.212 100.317,78.75 100.1,78.75 100.1,76.822 99.866,76.587 99.753,76.7 99.7,76.7 99.7,78.75 98.6,78.75 98.6,78.433 98.35,78.433 98.25,78.533 98.25,79.3 96.95,79.3 96.95,79.083
  pour cut-out: 108.5,71.101 108.426,71.101 108.373,71.049 108.1,71.322 108.1,72.05 107.883,72.05 107.883,72.25 108.1,72.25 108.1,73.55 107.883,73.55 107.883,74.05 108.05,74.05 108.05,75.417 108.35,75.417 108.35,75.2 108.717,75.2 108.717,73.55 108.5,73.55 108.5,72.25 108.717,72.25 108.717,72.05 108.5,72.05
  pour cut-out: 101.981,75.048 102.033,75.1 104.85,75.1 104.85,75.417 105.15,75.417 105.15,74.05 107.217,74.05 107.217,73.55 107,73.55 107,72.436 106.983,72.419 106.847,72.419 106.847,72.424 105.688,73.583 104.744,73.583 104.608,73.719 104.608,74.228 103.952,74.883 103.35,74.883 103.35,74.95 102.062,74.95
  pour cut-out: 96.733,74.3 96.733,74.7 99.15,74.7 99.15,75.667 99.852,75.667 100.436,76.25 101.2,76.25 101.2,76.567 101.9,76.567 102.2,76.867 105.221,76.867 106.695,78.341 108.15,78.341 108.15,77.794 109.361,76.583 109.078,76.3 108.567,76.3 108.222,75.956 102.11,75.956 101.094,74.94 101.094,73.65 99.15,73.65 99.15,74.3
  pour cut-out: 83.464,81.24 83.464,81.328 83.503,81.367 85.7,81.367 85.7,81 86.192,81 86.192,80.138 86.112,80.058 84.434,80.058 84.383,80.109 84.383,80.703 83.952,81.133 83.569,81.133
  pour cut-out: 91.1,74.9 91.2,74.9 91.4,74.7 92,74.7 92,76.192 92.666,76.808 94.328,76.808 94.552,76.583 94.775,76.583 94.775,78.917 94.75,78.942 86.287,78.942 85.844,79.385 85.6,79.385 85.6,78.5 87.5,78.5
  pour cut-out: 85.658,77.5 85.658,74.888 86.963,73.583 90.517,73.583 86.6,77.5
  pour cut-out: 81.608,64.086 81.608,64.039 81.75,63.897 82.335,63.897 86.192,67.753 86.192,68.504 86.123,68.504 86.074,68.553
  pour cut-out: 84.367,64.114 84.423,64.058 84.423,64 84.771,64 84.875,63.897 87.192,66.213 87.192,66.773 87.143,66.822 87.074,66.822
  pour cut-out: 94.165,63.897 94.472,63.897 94.64,64.065 94.64,64.113 91.976,66.778 91.927,66.729 91.858,66.729 91.858,66.203
  pour cut-out: 96.705,63.897 96.795,63.987 97.262,63.987 97.262,64.048 97.322,64.107 92.976,68.453 92.907,68.453 92.858,68.404 92.858,67.743
  pour cut-out: 81.608,69.308 81.608,75.9 82.125,76.417 83.375,76.417 83.375,72.292 83.375,71.075
  pour cut-out: 118.892,65.154 118.848,65.198 118.765,65.198 118.765,65.535 118.393,65.535 118.393,65.916 119.033,66.556 119.033,66.8 119.35,66.8 119.35,67.017 119.55,67.017 119.55,66.8 120.85,66.8 120.85,67.017 121.152,67.017 121.99,67.854 122.075,67.854 122.813,67.116 122.813,65.45 121.84,65.45 121.74,65.55 121.74,65.898 121.599,66.039 121.599,66.099 121.539,66.099 121.373,66.265 121.027,66.265 120.861,66.099 120.801,66.099 120.801,66.041 120.635,65.875 120.635,65.601 120.66,65.577 120.56,65.477 120.56,65.45 119.65,65.45 119.65,65.233 119.1,65.233 119.065,65.198 118.936,65.198
  pour cut-out: 121.849,77.597 121.898,77.646 121.967,77.646 121.967,80.362 120.997,81.332 120.942,81.332 120.88,81.269 120.883,81.265 120.883,78.563
Bottom Layer:
  pour cut-out: 90.654,66.679 90.875,66.9 90.875,68.025 91.192,68.025 91.192,68.776 90.971,68.996 90.555,68.996 90.358,68.799 90.358,66.679
  pour cut-out: 86.592,77.375 86.458,77.375 86.433,77.4 86.433,78.153 86.592,78.312
  pour cut-out: 81.333,80.125 81.467,80.125 81.467,81.45 81.492,81.475 81.492,81.613 81.85,81.972 81.333,81.972
  pour cut-out: 80.35,78.625 80.45,78.825 81.482,78.825 81.482,78.747 81.703,78.526 81.654,78.477 81.654,78.408 80.35,78.408
  pour cut-out: 83.078,78.837 83.05,78.865 83.05,79.142 84.537,79.142 85.792,77.887 85.792,77.375 85.475,77.375 85.475,76.642 85.426,76.593 85.358,76.593
  pour cut-out: 95.382,77.767 95.382,77.35 95.358,77.327 95.358,77.232 95.392,77.232 95.485,77.139 95.496,77.15 97.109,77.15 97.109,77.491 97.1,77.5 97.092,77.492 96.012,77.492 95.737,77.767
  pour cut-out: 95.899,67.572 95.948,67.621 96.017,67.621 96.017,68.45 95.8,68.45 95.8,69.75 96.017,69.75 96.017,70.943 95.466,70.943 95.442,70.967 95.364,70.888 95.364,70.768 95.382,70.75 95.382,69.156 95.358,69.132 95.358,68.113
  pour cut-out: 89.477,79.795 90.056,80.374 91.5,80.374 91.5,82.1 90.533,83.067 88.508,83.067 88.508,81.05 88.508,80.763

## Silkscreen, mask and mechanical layers (free items; w line width, h text height)
Top Overlay:
  text "ADS1298" at 86.525,71.625 h1
Bottom Overlay:
  text "Wire\Wireles Neuro switch / ADS129x" at 110.475,85.675 h1.52 r270

## Text inside footprints (layer, text, board x,y; h text height)
P1: Top Overlay "2" at 79.475,62.875 h0.5; Top Overlay "1" at 79.625,59.875 h0.5; Top Overlay "17" at 103.8,59.925 h0.5; Top Overlay "18" at 103.825,63.275 h0.5